# EAGLE board magnetic-rotary-encoder (EAGLE 4.16)
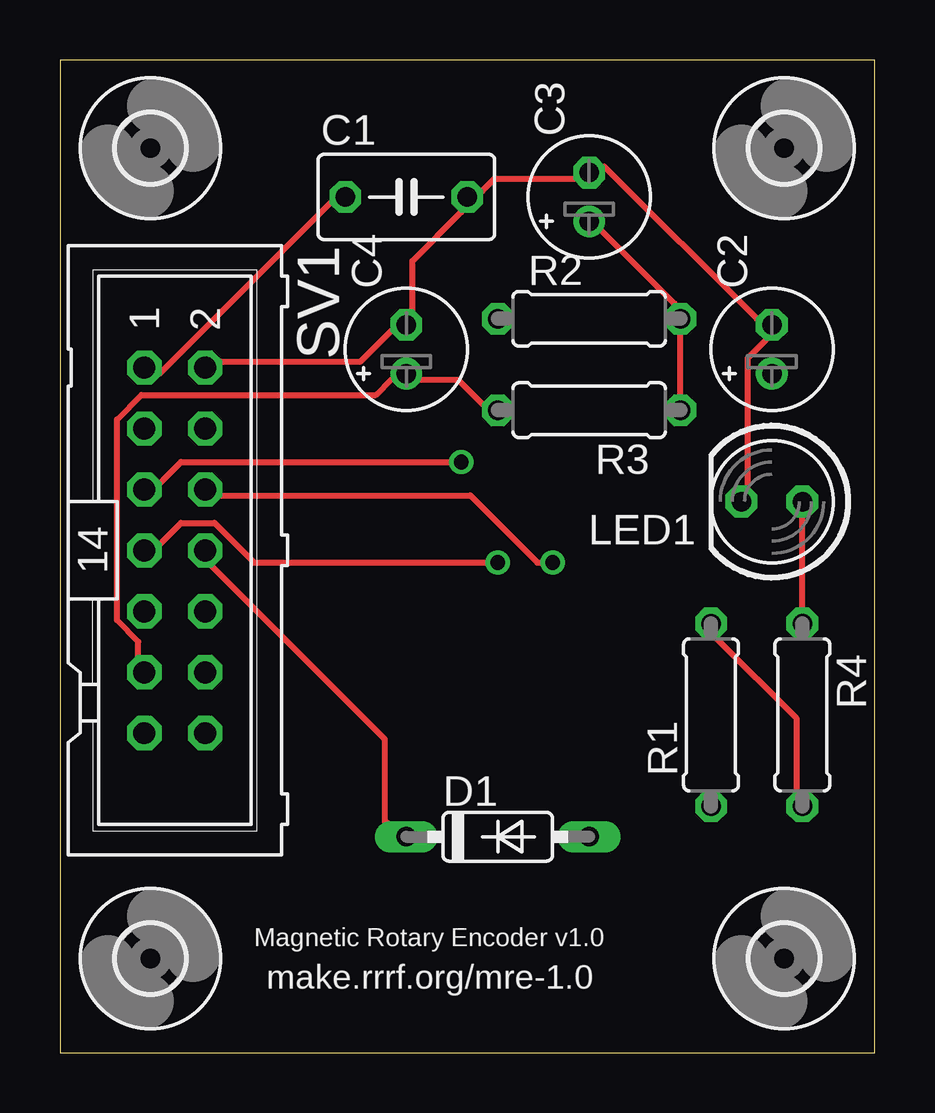
[diagram p0: board, top side]
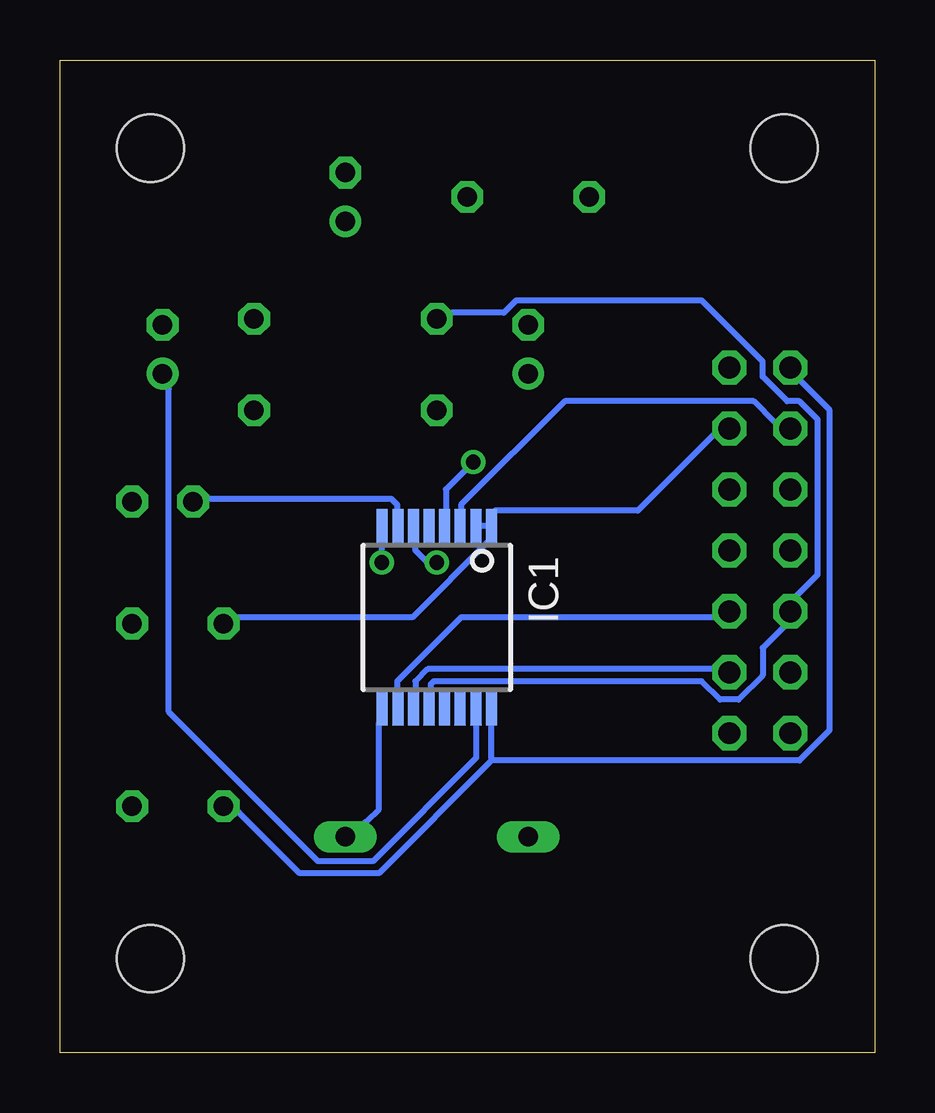
[diagram p1: board, bottom side, seen from below]

Size 33.96 x 41.39 mm. Coordinates in mm from the lower left corner, seen from the top.
Outline: 0,0 33.96,0 33.96,41.39 0,41.39 0,0
Copper layers (1*16): Top 0.035mm / dielectric 1.5mm / Bottom 0.035mm
Design rules "default": minimum track width 10mil, minimum drill 24mil, track to track 8mil, track to pad 8mil, pad to pad 8mil, via to via 8mil, smd to smd 8mil, copper to edge 40mil, drill to drill 8mil, minimum pad ring 10mil, minimum via ring 8mil, stop-mask expansion 4mil, vias tented up to drill 0mil, thermal gap 10mil

## Footprints (pad centres in the part's own frame; a part is rotated, then mirrored left to right if it is on the bottom)
C050-035X075 = drill 0.813 octagon: 1 -2.54,0; 2 2.54,0
E2-5 = drill 0.813 pad 1.27 round: + -1.016,0 | drill 0.813 pad 1.27 octagon: - 1.016,0
DO35-7 = drill 0.813 long: A 3.81,0; C -3.81,0
2,8 = hole 2.8: 0,0
SSOP16 = smd 0.46 x 1.43: 1 -2.275,-3.795; 2 -1.625,-3.795; 3 -0.975,-3.795; 4 -0.325,-3.795; 5 0.325,-3.795; 6 0.975,-3.795; 7 1.625,-3.795; 8 2.275,-3.795; 9 2.275,3.795; 10 1.625,3.795; 11 0.975,3.795; 12 0.325,3.795; 13 -0.325,3.795; 14 -0.975,3.795; 15 -1.625,3.795; 16 -2.275,3.795
LED5MM = drill 0.813 octagon: A -1.27,0; K 1.27,0
0207/7 = drill 0.813 octagon: 1 -3.81,0; 2 3.81,0
ML14 = drill 0.914 octagon: 1 -7.62,-1.27; 2 -7.62,1.27; 3 -5.08,-1.27; 4 -5.08,1.27; 5 -2.54,-1.27; 6 -2.54,1.27; 7 0,-1.27; 8 0,1.27; 9 2.54,-1.27; 10 2.54,1.27; 11 5.08,-1.27; 12 5.08,1.27; 13 7.62,-1.27; 14 7.62,1.27

## Placement (x,y rotation side)
C1  100nF  [C050-035X075]  14.44,35.68 0 top
C2  10uF  [E2-5]  29.68,29.33 90 top
C3  1uF  [E2-5]  22.06,35.68 90 top
C4  1uF  [E2-5]  14.44,29.33 90 top
D1  1N5817  [DO35-7]  18.25,9.01 0 top
H1  MOUNT-HOLE2.8  [2,8]  3.77,37.71 0 top
H2  MOUNT-HOLE2.8  [2,8]  3.77,3.93 0 top
H3  MOUNT-HOLE2.8  [2,8]  30.19,3.93 0 top
H4  MOUNT-HOLE2.8  [2,8]  30.19,37.71 0 top
IC1  AS5040  [SSOP16]  18.25,18.16 180 bottom
LED1  [LED5MM]  29.68,22.98 180 top
R1  4.7K  [0207/7]  27.14,14.09 90 top
R2  4.7K  [0207/7]  22.06,30.6 0 top
R3  4.7K  [0207/7]  22.06,26.79 180 top
R4  330  [0207/7]  30.95,14.09 270 top
SV1  [ML14]  4.79,20.95 270 top

## Library data of the parts
C1-C4 R1-R4 = rcl
D1 = diode
H1-H4 = holes
IC1 = austriamicrosystems
LED1 = led
SV1 = con-harting-ml

## Nets
ANALOG: C4.+ R3.2 SV1.11
CALIBRATE: IC1.1 IC1.2 R1.2 R4.2 SV1.4
DATA_OUT: D1.C SV1.8
DATA_OUT_PRE: D1.A IC1.9
GND: C1.2 C2.- C3.- C4.- IC1.7 LED1.K SV1.2
N$1: IC1.11 SV1.12
N$2: C3.+ R2.2 R3.1
N$3: IC1.3 SV1.3
N$4: IC1.4 SV1.5
N$5: IC1.6 SV1.7
N$6: IC1.10 SV1.10
N$7: LED1.A R4.1
N$8: C2.+ IC1.15
N$9: IC1.8 SV1.6
PWM: IC1.12 R2.1 SV1.9
VCC: C1.1 IC1.16 R1.1 SV1.1

## Tracks (layer width: path | path; a pad name or v marks a point on that pad's centre or on a via)
ANALOG
  Top 0.254: R3.2 17.61,27.05 16.6,28.06 15.08,28.06 C4.+ 13.81,28.06 13.17,27.43 3.39,27.43 2.38,26.41 2.38,18.03 3.26,17.14 3.26,16.5 SV1.11
CALIBRATE
  Top 0.254: R4.2 30.7,10.92 30.7,13.96 27.39,17.27 R1.2
  Bottom 0.254: IC1.1 16.09,21.97 16.47,21.97 IC1.2 | IC1.1 15.84,22.6 9.87,22.6 6.69,25.78 SV1.4 | R1.2 26.5,18.16 19.27,18.16 16.09,21.33 IC1.1
DATA_OUT
  Top 0.254: D1.C 13.55,9.65 13.55,13.08 6.31,20.32 SV1.8
DATA_OUT_PRE
  Bottom 0.254: IC1.9 20.66,13.71 20.66,10.16 21.17,9.65 D1.A
GND
  Top 0.254: LED1.K 28.66,23.62 28.66,28.95 29.43,29.71 C2.- 29.04,30.6 22.7,36.95 C3.- 21.42,36.44 18.12,36.44 17.61,35.94 C1.2 16.73,35.05 14.69,33.02 14.69,30.98 C4.- 13.81,30.09 12.54,28.82 6.69,28.82 SV1.2
  Bottom 0.254: IC1.7 19.9,22.6 19.9,22.86 20.15,23.11 27.77,23.11 LED1.K
N$1
  Bottom 0.254: IC1.11 19.14,14.98 19.14,15.49 18.63,16 6.69,16 SV1.12
N$2
  Top 0.254: R3.1 R2.2 25.62,31.24 22.57,34.28 C3.+
N$3
  Bottom 0.254: IC1.3 17.23,22.6 17.23,22.86 12.92,27.17 5.04,27.17 4.15,26.28 SV1.3
N$4  (via drill 0.61)
  Top 0.254: v16.73,24.63 5.04,24.63 4.15,23.74 SV1.5
  Bottom 0.254: v16.73,24.63 17.87,23.49 17.87,22.6 IC1.4
N$5  (via drill 0.61)
  Top 0.254: v18.25,20.44 8.09,20.44 6.44,22.09 5.04,22.09 4.15,21.2 SV1.7
  Bottom 0.254: v18.25,20.44 18.63,20.44 19.14,20.95 19.14,21.33 IC1.6
N$6
  Bottom 0.254: IC1.10 19.9,14.98 19.9,15.49 17.23,18.16 6.69,18.16 SV1.10
N$7
  Top 0.254: R4.1 LED1.A
N$8
  Bottom 0.254: IC1.15 16.6,13.71 16.6,12.31 20.92,8 23.2,8 29.43,14.22 29.43,27.68 C2.+
N$9  (via drill 0.61)
  Top 0.254: v20.54,20.44 19.9,20.44 17.11,23.24 6.69,23.24 SV1.6
  Bottom 0.254: v20.54,20.44 20.54,21.33 IC1.8
PWM
  Bottom 0.254: IC1.12 18.5,14.98 18.5,15.36 18.38,15.49 7.2,15.49 6.44,14.73 5.68,14.73 4.66,15.74 4.66,16.89 3.77,17.77 SV1.9 3.26,19.04 2.38,19.93 2.38,26.41 3.14,27.17 3.64,27.17 4.66,28.19 4.66,28.82 7.2,31.36 14.95,31.36 15.46,30.86 17.61,30.86 R2.1
VCC
  Top 0.254: C1.1 11.27,35.43 4.15,28.32 SV1.1
  Bottom 0.254: 15.96,12.19 15.96,13.71 IC1.16 | 15.96,12.19 20.66,7.49 23.96,7.49 26.5,10.03 R1.1 | 15.96,12.19 3.14,12.19 1.87,13.46 1.87,26.79 3.14,28.06 SV1.1

## Text on the board
tPlace: Magnetic Rotary Encoder v1.0 | make.rrrf.org/mre-1.0